# Altium PCB pcb.PcbDoc
Units mm, origin at the board's own origin, x right, y up, seen from the top; angles counter-clockwise.
Board outline 77.98 x 45.09 mm, 2 copper layers (Top Layer, Bottom Layer); 6 components, 6 nets, 80 pads, 0 vias.
Unrouted connection lines stored in the file: 4.
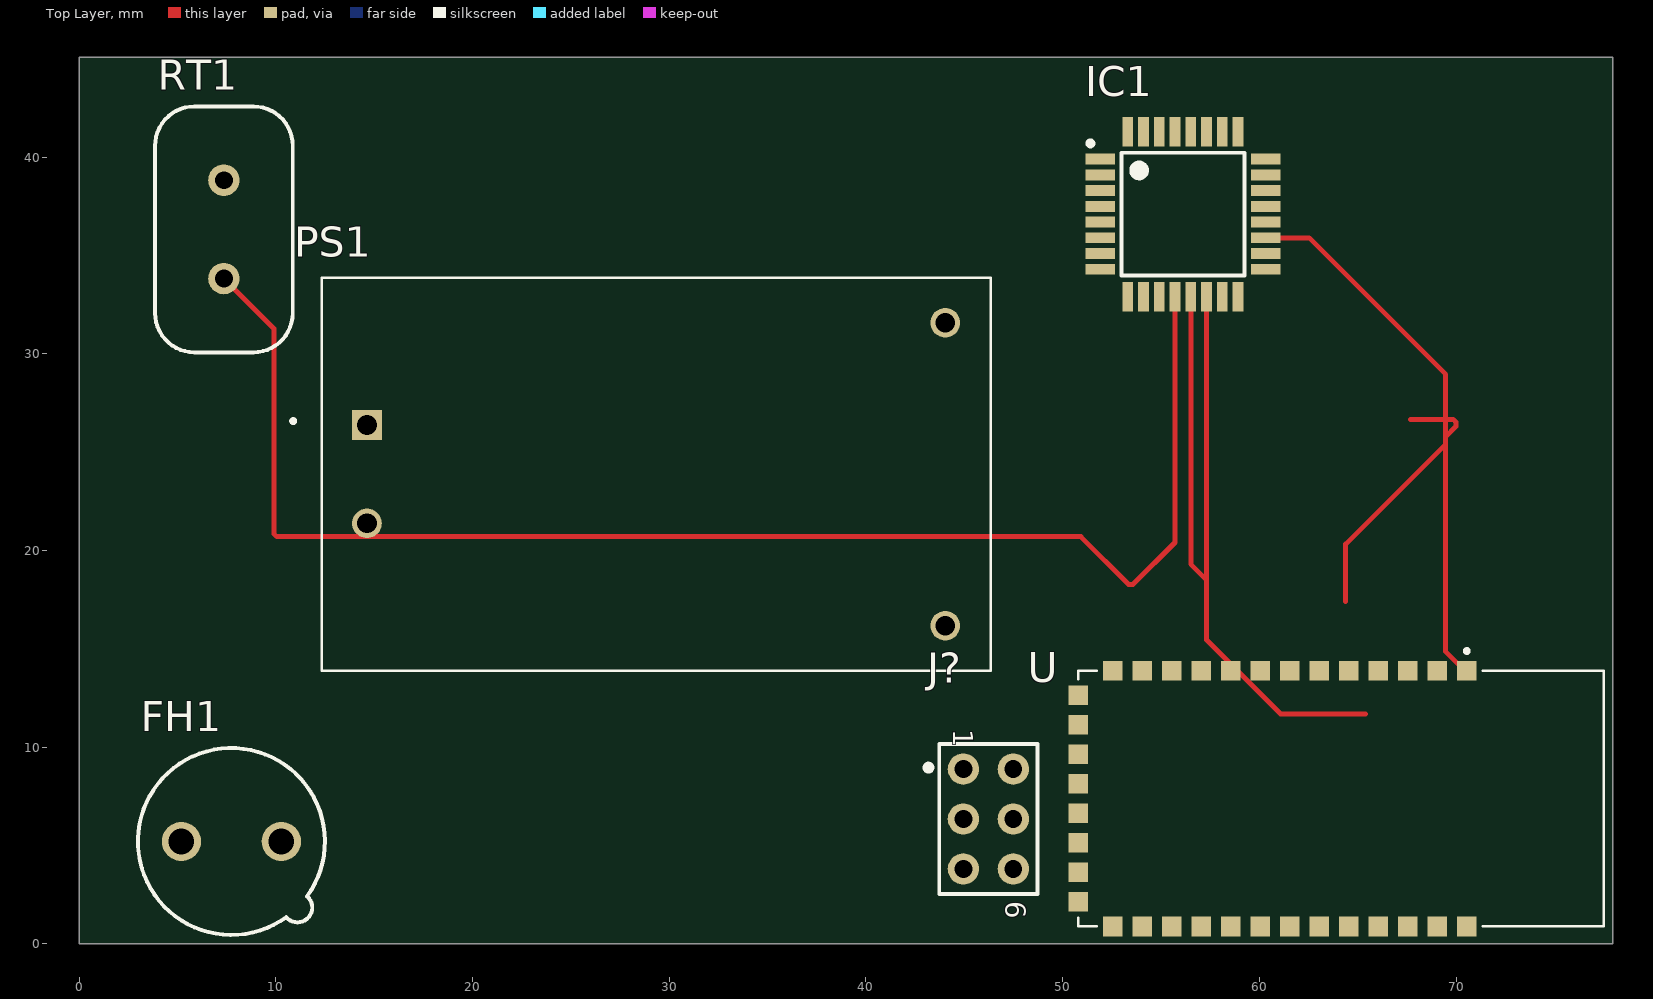
[diagram p0: Top Layer view]
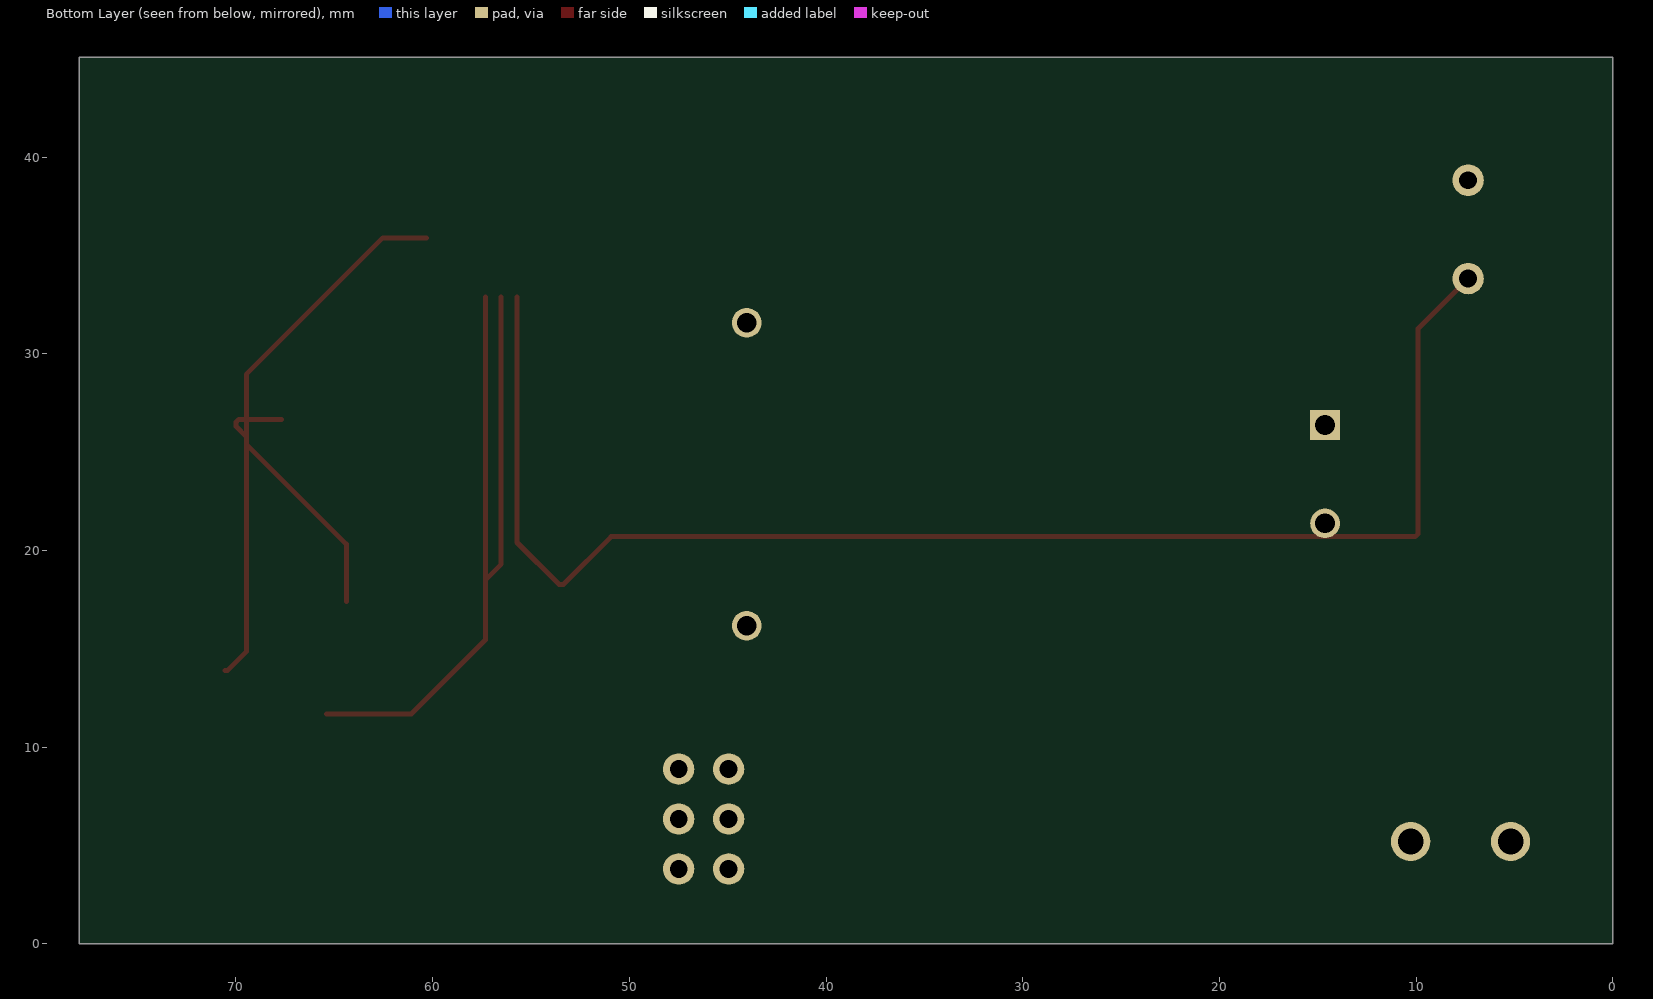
[diagram p1: Bottom Layer view, seen from below]

## Layer stack, top to bottom
Top Solder: solder mask 0.0102, Solder Resist, Dk 3.5
Top Layer: signal copper 0.0356
Dielectric 1: dielectric 0.32, FR-4, Dk 4.8
Bottom Layer: signal copper 0.0356
Bottom Solder: solder mask 0.0102, Solder Resist, Dk 3.5

## Board outline
0,0 77.978,0 77.978,45.085 0,45.085

## Design rules (kind name [scope] priority, off if disabled: settings)
Clearance [All] p1 off: gap=0.254 ignorepadtopadclearanceinfootprint=FALSE except(0: Arc-Hole Track-Hole SMDPad-Hole THPad-Hole Via-Hole Fill-Hole Poly-Hole Region-Hole Text-Hole)
PasteMaskExpansion PasteMaskExpansion_1 [All] p1: expansion=0
PasteMaskExpansion PasteMaskExpansion_VIAS [IsVia] p2: expansion=0
PolygonConnect [All] p1: connectstyle=Relief reliefconductorwidth=0.254 reliefentries=4 polygonreliefangle="90 Angle" airgapwidth=0.254
RoutingVias [All] p1: holewidth=0.711 width=1.27 viastyle="Through Hole" minholewidth=0.711 minwidth=1.27 maxholewidth=0.711 maxwidth=1.27
SolderMaskExpansion SolderMaskExpansion_1 [All] p1: expansion=0.102 istentingtop=FALSE
SolderMaskExpansion [IsVia] p2: expansion=0 istentingtop=FALSE useseparateexpansions=TRUE expansionbottom=0 istentingbottom=FALSE
Width [All] p1: maxlimit=0.254 minlimit=0.254 preferedwidth=0.254
29 further rules are at their usual default settings.

## Components (designator, comment, footprint, x,y, rotation, side; value= is the part's Value field where it differs from the comment)
FH1 "Fuse Holder" FUSH_SCHURTER_0031.7601 7.747,5.207 r0 top
IC1 "ATMEGA328P-AU" QFP80P900X900X120-32N 56.115,37.093 r0 top
J? "Header 6" COMATEL_389.0358.1.06.400 46.228,6.35 r270 top
PS1 "HLK-PM03" CONV_HLK-PM03 29.337,23.876 r0 top
RT1 "7k5" THERM_EPCOS_B75x 7.366,36.322 r90 top
U "BLUETOOTH-SERIAL-HC-06" XCVR_BLUETOOTH-SERIAL-HC-06 64.047,7.389 r270 top

## Footprints (in the part's own frame and the unit in brackets; to place one, negate y for a bottom-side part, rotate by r counter-clockwise, add the part's x,y. Pads: shape width x height; smd on the part's side, far side on the other; paste and mask are expansions set on the pad)
COMATEL_389.0358.1.06.400 [mm] "6 Contacts - Pitch 2.54mm - Dual Row Straight Strip Header - Insulator 1.7mm"
  round 1.6 hole 0.9: 1(-2.54,-1.27) 2(-2.54,1.27) 3(0,-1.27) 4(0,1.27) 5(2.54,-1.27) 6(2.54,1.27)
  silkscreen extent -3.81,-3.2 3.81,2.5, body extent -3.81,-3 3.81,2.5, height 8
CONV_HLK-PM03 [mm]
  rect 1.508x1.508 hole 1: PS-1(-14.7,2.5)
  round 1.508 hole 1: PS-2(-14.7,-2.5) PS-3(14.7,7.7) PS-4(14.7,-7.7)
  silkscreen extent -18.55,-10 17,10, body extent -17,-10.1 17,10.1, height 15.01
FUSH_SCHURTER_0031.7601 [mm] "Vertical Fuse Holder For D8.5x H 8.5mm Subminiature Fuses"
  round 2 hole 1.3: 1(-2.54,0) 2(2.54,0)
  silkscreen extent -4.75,-4.75 4.75,4.75, body extent -4.75,-4.75 4.75,4.75, height 4.4
QFP80P900X900X120-32N [mm] "QFP,0.80mm Pitch, Square; 32 Pin, 7.00mm L X 7.00mm W X 1.20mm H Body, IPC Medium Density"
  rect 1.5x0.55 smd: 1(-4.2,2.8) 2(-4.2,2) 4(-4.2,0.4) 5(-4.2,-0.4) 6(-4.2,-1.2) 7(-4.2,-2) 8(-4.2,-2.8) 17(4.2,-2.8) 18(4.2,-2) 19(4.2,-1.2) 20(4.2,-0.4) 21(4.2,0.4) 22(4.2,1.2) 23(4.2,2) 24(4.2,2.8) q(-4.2,1.2)
  rect 0.55x1.5 smd: 9(-2.8,-4.2) 10(-2,-4.2) 11(-1.2,-4.2) 12(-0.4,-4.2) 13(0.4,-4.2) 14(1.2,-4.2) 15(2,-4.2) 16(2.8,-4.2) 25(2.8,4.2) 26(2,4.2) 27(1.2,4.2) 28(0.4,4.2) 29(-0.4,4.2) 30(-1.2,4.2) 31(-2,4.2) 32(-2.8,4.2)
  silkscreen extent -4.82,-3.13 3.13,3.72, body extent -4.62,-4.62 4.62,4.62, height 1.2
THERM_EPCOS_B75x [mm] "PTC Thermistors, Body  D 12.5mm x W 7mm x H 16.5mm"
  round 1.6 hole 0.9: 1(-2.5,0) 2(2.5,0)
  silkscreen extent -6.25,-3.5 6.25,3.5, body extent -6.24,-3.5 6.24,3.5, height 16.49
XCVR_BLUETOOTH-SERIAL-HC-06 [mm]
  rect 1x1 smd: 1(-6.5,6.5) 2(-6.5,5) 3(-6.5,3.5) 4(-6.5,2) 5(-6.5,0.5) 6(-6.5,-1) 7(-6.5,-2.5) 8(-6.5,-4) 9(-6.5,-5.5) 10(-6.5,-7) 11(-6.5,-8.5) 12(-6.5,-10) 13(-6.5,-11.5) 14(-5.25,-13.25) 15(-3.75,-13.25) 16(-2.25,-13.25) 17(-0.75,-13.25) 18(0.75,-13.25) 19(2.25,-13.25) 20(3.75,-13.25) 21(5.25,-13.25) 22(6.5,-11.5) 23(6.5,-10) 24(6.5,-8.5) 25(6.5,-7) 26(6.5,-5.5) 27(6.5,-4) 28(6.5,-2.5) 29(6.5,-1) 30(6.5,0.5) 31(6.5,2) 32(6.5,3.5) 33(6.5,5) 34(6.5,6.5)
  silkscreen extent -7.6,-13.25 6.5,13.45, body extent -6.5,-13.25 6.5,13.75, height 4.31

## Part data
FH1: library part FUSH_SCHURTER_0031.7601, Manufacturer=SCHURTER, Manufacturer Part Number=0031.7601, Author="CERN DEM JLC", Component Type=Standard, ComponentHeight=4.4mm, CreateDate=12/09/2012, Family="Fuse Holder", HelpURL=\\cern.ch\dfs\Applications\Altium\Datasheets\FUSH_SCHURTER_0031.7601.pdf, LatestRevisionDate=12/09/2012, Mounted=Yes, PackageDescription="Vertical Fuse Holder For D8.5x H 8.5mm Subminiature Fuses", Part Description="Vertical Fuse Holder For D8.5 x H8.5mm Subminiature Fuses", Part Number=FUSH_SCHURTER_0031.7601, Pin Count=2, PressFit=No, Sense=No, SMD=No, Socket=No
IC1: "8-bit AVR Microcontroller, 32KB Flash, 1KB EEPROM, 2KB SRAM, 32-pin TQFP, Industrial Grade (-40°C to 85°C)", Case=QFP32, Manufacturer=ATMEL, Author="CERN DEM JLC", Bonding=No, Component Type=Standard, ComponentHeight=1.2mm, CreateDate=02/07/2014, Device=ATMEGA328P-AU, HelpURL=\\cern.ch\dfs\Applications\Altium\Datasheets\ATMEGA328P-AU.pdf, LatestRevisionDate=02/07/2014, Manufacturer Part Number=ATMEGA328P-AU, Mounted=Yes, PackageDescription="QFP,0.80mm Pitch, Square; 32 Pin, 7.00mm L X 7.00mm W X 1.20mm H Body, IPC Medium Density", Part Description="8-bit AVR Microcontroller, 32KB Flash, 1KB EEPROM, 2KB SRAM, 32-pin TQFP, Industrial Grade (-40°C to 85°C)", Part Number=ATMEGA328P-AU, Pin Count=32, PressFit=No, Sense=No, SMD=Yes, Socket=No
J?: library part COMATEL_389.0358.1.06.400, "Connector 6 Male", Manufacturer="KONTEK COMATEL", Manufacturer Part Number=389.0358.1.06.400, Author="CERN DEM JLC", Component Type=Standard, ComponentHeight=8mm, CreateDate=21/09/2010, Family="Header 6", HelpURL=\\cern.ch\dfs\Applications\Altium\Datasheets\COMATEL_389.0358.1.06.400.pdf, LatestRevisionDate=21/09/2010, Mounted=Yes, Part Description="6 Contacts - Pitch 2.54mm - Dual Row Straight Strip Header - Insulator 1.7mm", Part Number=COMATEL_389.0358.1.06.400, Pin Count=6, PressFit=No, Sense=No, SMD=No, Socket=No, Status=Obsolete
PS1: "AC DC 3W power module", Package=Package, Availability=Unavailable, MF=Hi-link, MP=HLK-PM03, Price=None, SnapEDA_Link=https://www.snapeda.com/parts/HLK-PM03/Hi-link/view-part/3215695/?ref=snap
RT1: library part THERM_PTC_7K5_EPCOS_B59758B0110A070, "Thermistor NTC (Positive Temperature Coefficient)", Manufacturer=EPCOS, Manufacturer Part Number=B59758B0110A070, Power=8mA, Tolerance=±33%, Voltage=1000VDC, Author="CERN DEM BC", Component Type=Standard, ComponentHeight=16.5mm, CreateDate=13/11/2015, HelpURL=\\cern.ch\dfs\Applications\Altium\Datasheets\THERM_EPCOS_B5975xx.pdf, LatestRevisionDate=13/11/2015, Mounted=Yes, Part Description="PTC Thermistors for Overcurrent Protection", Part Number=THERM_PTC_7K5_EPCOS_B59758B0110A070, Pin Count=2, Sense=No, SMD=No, Socket=No, Status=None
U: "Bluetooth Modules _802.15.1_ BLUETOOTH-SERIAL-HC-06", Package=None, Availability=Unavailable, MF=Olimex, MP=BLUETOOTH-SERIAL-HC-06, Price=None, SnapEDA_Link=https://www.snapeda.com/parts/BLUETOOTH-SERIAL-HC-06/Olimex/view-part/2768234/?ref=snap

## Nets (pads, with @x,y where several pads share a name; then routed paths per layer and width w, separated by ;. In a path a pad name is that pad's centre, name@x,y a point inside that pad or via, vN(x,y) a via of type N, cw(c..) or ccw(c..) an arc to the next point about the centre after c; other vN are vias at no path point)
BT_ENABLE: IC1.15
BT_RX: IC1.13 U.2
BT_STATUS: IC1.14 U.24
BT_TX: IC1.12 U.1
NetFH1_2: FH1.2 RT1.2
NetPS1_2: RT1.1
pads on no net: FH1.1 IC1.1 IC1.2 IC1.4 IC1.5 IC1.6 IC1.7 IC1.8 IC1.9 IC1.10 IC1.11 IC1.16 IC1.17 IC1.18 IC1.19 IC1.20 IC1.21 IC1.22 IC1.23 IC1.24 IC1.25 IC1.26 IC1.27 IC1.28 IC1.29 IC1.30 IC1.31 IC1.32 IC1.q J?.1 J?.2 J?.3 J?.4 J?.5 J?.6 PS1.PS-1 PS1.PS-2 PS1.PS-3 PS1.PS-4 U.3 U.4 U.5 U.6 U.7 U.8 U.9 U.10 U.11 U.12 U.13 U.14 U.15 U.16 U.17 U.18 U.19 U.20 U.21 U.22 U.23 U.25 U.26 U.27 U.28 U.29 U.30 U.31 U.32 U.33 U.34
copper on no net: | length 157.5
  Top Layer w0.254: 7.366,33.822 9.906,31.282 9.906,20.85 10.055,20.701 50.927,20.701 53.362,18.266 53.572,18.266 55.715,20.409 55.715,32.893 ; 56.515,32.893 56.515,19.304 57.277,18.542 ; 57.315,32.893 57.315,15.456 61.087,11.684 65.405,11.684 ; 60.315,35.893 62.532,35.893 69.469,28.956 69.469,14.859 69.723,14.605 70.439,13.889 70.547,13.889 ; 64.389,17.399 64.389,20.32 69.469,25.4 69.469,25.781 69.999,26.311 69.999,26.521 69.85,26.67 67.691,26.67

## Text inside footprints (layer, text, board x,y; h text height)
J?: Top Overlay "1" at 44.45,10.922 h1.02 r270; Top Overlay "6" at 47.117,2.159 h1.02 r270
U: Mechanical 13 "ANTENNA" at 74.207,11.199 h1.27 r270